# Altium PCB AD8368.PcbDoc
Units mil, origin at the board's own origin, x right, y up, seen from the top; angles counter-clockwise.
Board outline 800 x 800 mil, 4 copper layers (Top Layer, Layer 1, Layer 2, Bottom Layer), stack 23.756 mil thick; 26 components, 15 nets, 86 pads, 89 vias.
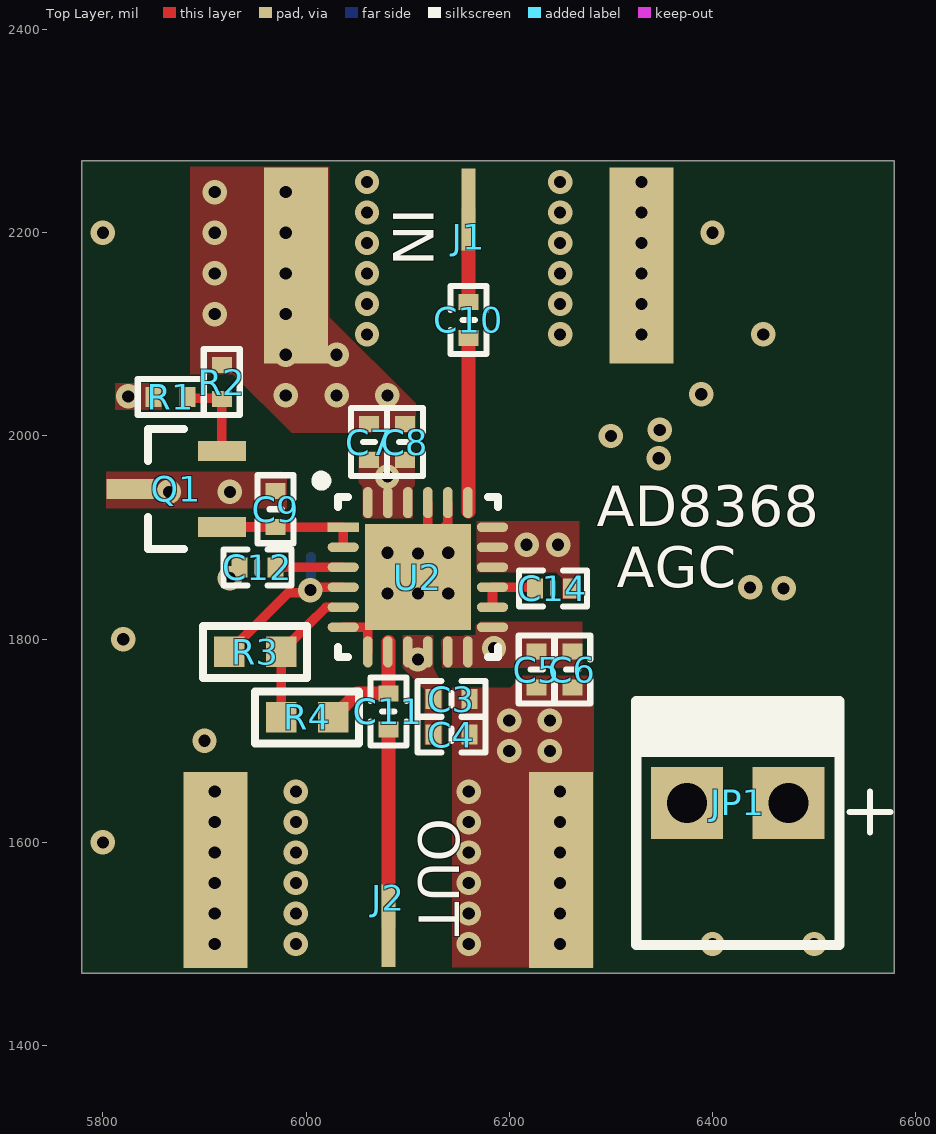
[diagram p0: Top Layer view]
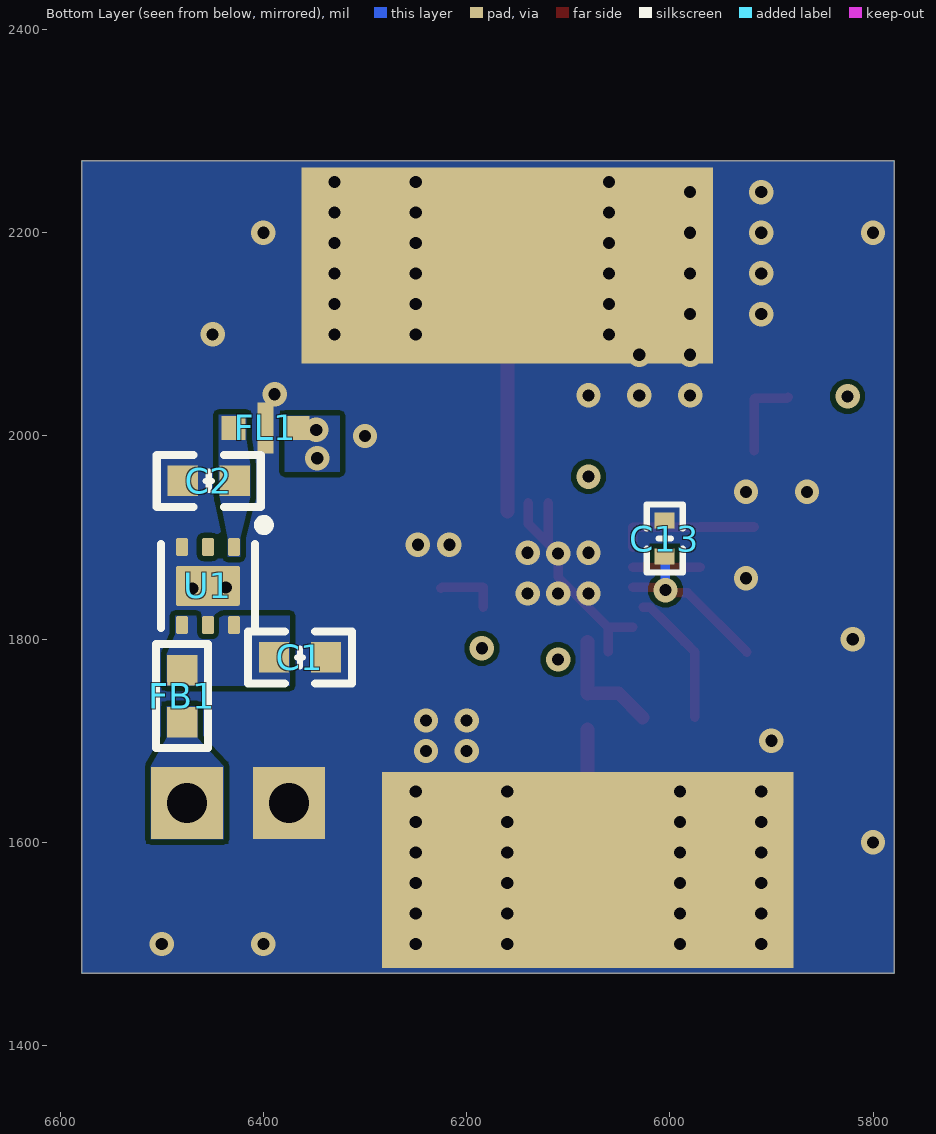
[diagram p1: Bottom Layer view, seen from below]
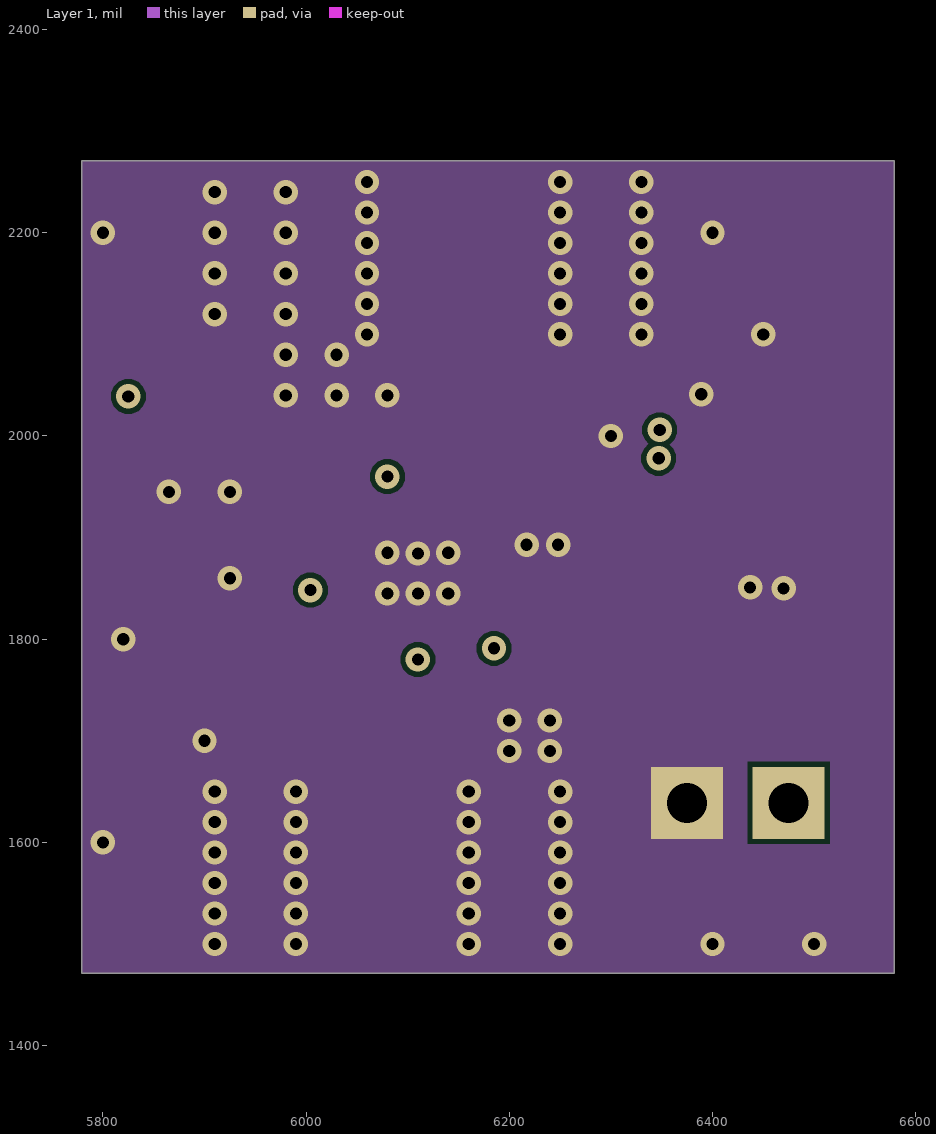
[diagram p2: Layer 1]
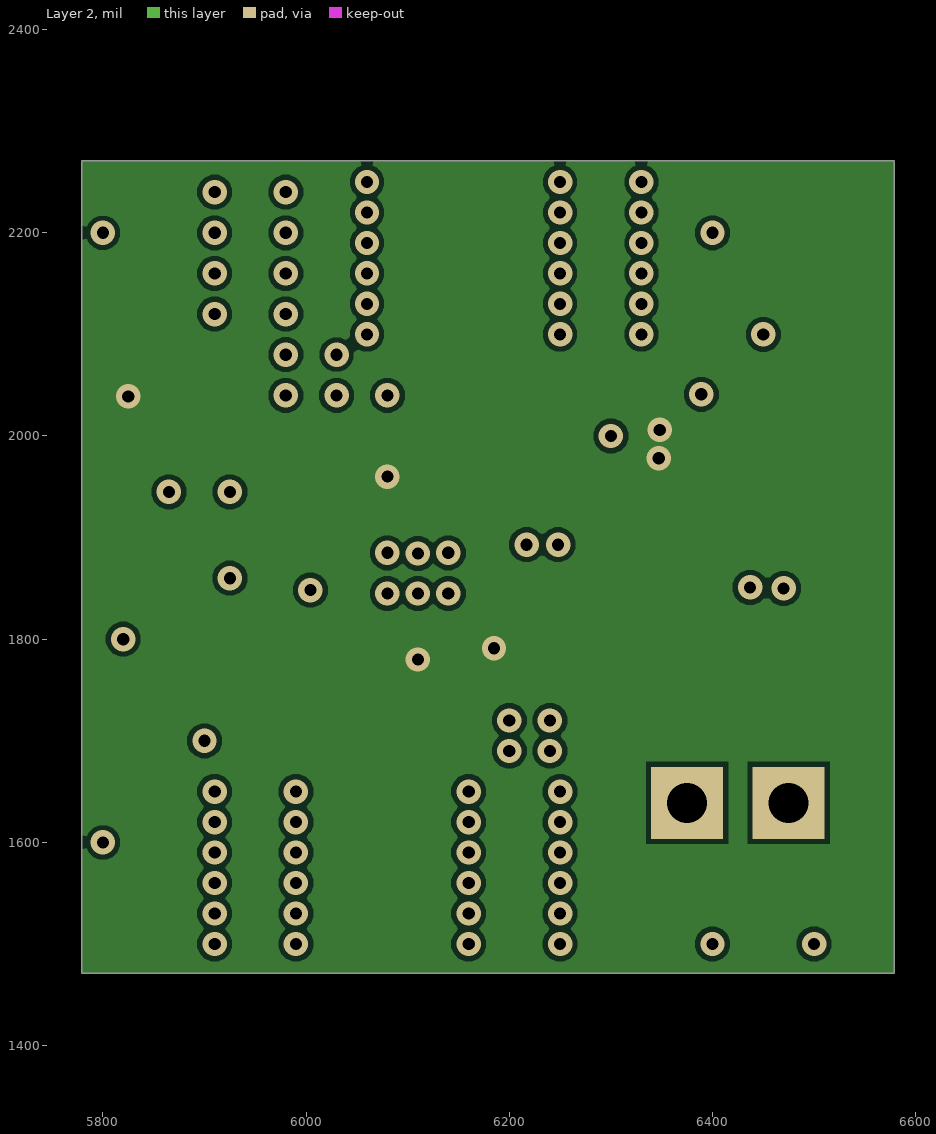
[diagram p3: Layer 2]

## Layer stack, top to bottom
Top Solder: solder mask 0.4, Solder Resist, Dk 3.5
Top Layer: signal copper 1.4
Dielectric 2: prepreg 2.8, PP-006, Dk 4.1
Layer 1: signal copper 1.378
Dielectric 1: dielectric 12.6, FR-4, Dk 4.8
Layer 2: signal copper 1.378
Dielectric 3: prepreg 2.8, PP-006, Dk 4.1
Bottom Layer: signal copper 1.4
Bottom Solder: solder mask 0.4, Solder Resist, Dk 3.5

## Board outline
5779,1471 6579,1471 6579,2271 5779,2271

## Design rules (kind name [scope] priority, off if disabled: settings)
Clearance [All] p1: gap=4 ignorepadtopadclearanceinfootprint=TRUE
PlaneConnect [All] p1: planeconnectstyle=Direct reliefexpansion=20 reliefentries=4 reliefconductorwidth=10 reliefairgap=10
PolygonConnect [All] p1: connectstyle=Direct reliefconductorwidth=10 reliefentries=4 polygonreliefangle="90 Angle" airgapwidth=10
RoutingVias [All] p1: holewidth=28 width=50 viastyle="Through Hole" minholewidth=28 minwidth=50 maxholewidth=28 maxwidth=50
SolderMaskExpansion [All] p1: expansion=4 istentingtop=FALSE
Width [All] p1: maxlimit=20 minlimit=9 preferedwidth=13.48
29 further rules are at their usual default settings.

## Components (designator, comment, footprint, x,y, rotation, side; value= is the part's Value field where it differs from the comment)
C1 "1uF" "C 0603_L" 6364,1782 r180 bottom
C2 "4.7uF" "C 0603_L" 6453.77,1955.8 r0 bottom
C3 "1nF" "C 0402_L" 6143,1741 r180 top
C4 "100nF" "C 0402_L" 6143,1706 r180 top
C5 "1nF" "C 0402_L" 6227,1770 r90 top
C6 "100nF" "C 0402_L" 6262,1770 r90 top
C7 "1nF" "C 0402_L" 6062,1994 r270 top
C8 "100nF" "C 0402_L" 6097.33,1993.94 r270 top
C9 "100nF" "C 0402_L" 5970,1927.93 r270 top
C10 "100nF" "C 0402_L" 6160,2114.28 r270 top
C11 "100nF" "C 0402_L" 6081,1729 r270 top
C12 "100nF" "C 0402_L" 5952.28,1870.72 r180 top
C13 "3.3nF" "C 0402_L" 6005,1899 r90 bottom
C14 "8.2nF" "C 0402_L" 6243,1850 r0 top
FB1 "120欧磁珠" "R 0603_L" 6480,1744 r90 bottom
FL1 "NFM18CC223R1C3D" FIL_NFM18CC223R1C3D 6398.01,2008 r180 bottom
J1 "132414" CONN_132414_AMP 6160,2368 r0 top
J2 "132414" CONN_132414_AMP 6081,1373 r180 top
JP1 "HDR-1X2" KF2510-LI-2P 6425,1639 r0 top
Q1 "2N2907" SOT23-3N 5872,1948 r90 top
R1 "910" "R 0402_L" 5867.73,2038.23 r180 top
R2 "100" "R 0402_L" 5917,2054 r270 top
R3 "120" "R 0603_L" 5949.82,1787.41 r0 top
R4 "270" "R 0603_L" 6001,1723 r0 top
U1 "LP5912-5.0DRVT" FP-DRV0006A-MFG 6454.59,1852.39 r270 bottom
U2 "AD8368ACPZ-REEL7" FP-CP-24-7-IPC_C 6110,1861 r0 top

## Footprints (in the part's own frame and the unit in brackets; to place one, negate y for a bottom-side part, rotate by r counter-clockwise, add the part's x,y. Pads: shape width x height; smd on the part's side, far side on the other; paste and mask are expansions set on the pad)
"C 0402_L" [mm] "无极性贴片电容"
  rect 0.4x0.5 smd: 1(-0.45,0) 2(0.45,0)
  silkscreen extent -0.85,-0.45 0.85,0.45, body extent -0.5,-0.26 0.5,0.26, height 0.53
"C 0603_L" [mil] "无极性贴片电容"
  rect 30x30 smd: 1(-25.59,0) 2(25.59,0)
  silkscreen extent -51,-26 51,26, body extent -31,-16 31,16, height 32
CONN_132414_AMP [mil]
  rect 13.75x81 smd paste+0 mask+0: 1(0,-145)
  rect 63x193 smd mask+0: 2(-170,-200) 3(170,-200)
  rect 405x193 smd far side mask+0: 4(0,-200)
  body extent -188,-292 188,270, height 162
FIL_NFM18CC223R1C3D [mm]
  rect 0.6x0.6 smd: 1(-0.8,0) 3(0.8,0)
  rect 0.4x1.27 smd: 2(0,0)
  body extent -0.8,-0.4 0.8,0.4, height 0.7
FP-CP-24-7-IPC_C [mm]
  rect 0.781x0.239 smd paste+0 mask+0: 1(-1.866,1.25)
  rrect100% 0.781x0.239 smd paste+0 mask+0: 2(-1.866,0.75) 3(-1.866,0.25) 4(-1.866,-0.25) 5(-1.866,-0.75) 6(-1.866,-1.25) 13(1.866,-1.25) 14(1.866,-0.75) 15(1.866,-0.25) 16(1.866,0.25) 17(1.866,0.75) 18(1.866,1.25)
  rrect100% 0.239x0.781 smd paste+0 mask+0: 7(-1.25,-1.866) 8(-0.75,-1.866) 9(-0.25,-1.866) 10(0.25,-1.866) 11(0.75,-1.866) 12(1.25,-1.866) 19(1.25,1.866) 20(0.75,1.866) 21(0.25,1.866) 22(-0.25,1.866) 23(-0.75,1.866) 24(-1.25,1.866)
  rect 2.65x2.65 smd paste-1000 mask+0: 25(0,0)
  silkscreen extent -2.54,-2 2,2.54, body extent -2.36,-2.36 2.36,2.36, height 0.25
FP-DRV0006A-MFG [mm]
  rrect33% 0.45x0.3 smd paste+0 mask+0: 1(-0.975,0.65) 2(-0.975,0) 3(-0.975,-0.65) 4(0.975,-0.65) 5(0.975,0) 6(0.975,0.65)
  rrect10% 1x1.6 smd paste-1000 mask+0: 7(0,0)
  silkscreen extent -1.65,-1.17 1.05,1.52, body extent -1,-1 1,1, height 0.8
KF2510-LI-2P [mm] "接插件/2A"
  rect 1.8x1.8 hole 1: 1(-1.27,0) 2(1.27,0)
  silkscreen extent -2.59,-3.56 2.54,2.54, body extent -2.54,-3.5 2.54,2.4, height 11.05
"R 0402_L" [mm] "1/16W贴片电阻 https://item.taobao.com/item.htm?ft=t&id=613637044352"
  rect 0.4x0.5 smd: 1(-0.4,0) 2(0.45,0)
  silkscreen extent -0.8,-0.45 0.85,0.45, body extent -0.5,-0.25 0.5,0.25, height 0.3
"R 0603_L" [mil] "1/10W贴片电阻 https://item.taobao.com/item.htm?ft=t&id=613637044352"
  rect 30x30 smd: 1(-25.59,0) 2(25.59,0)
  silkscreen extent -51,-26 51,26, body extent -31,-16 31,16, height 16
SOT23-3N [mm] "3x1.3x1mm(长宽高)"
  rect 0.5x1.2 smd: 1(-0.95,-1.143) 2(0.95,-1.143) 3(0,1.143)
  silkscreen extent -1.5,-0.2 1.5,0.7, body extent -1.5,-1.2 1.5,1.2, height 1.05

## Part data
C1 C2 C3 C4 C5 C6 C7 C8 C9 C10 C11 C12 C13 C14: library part C, "贴片电容", BOM名称=贴片电容, 下单链接=https://item.taobao.com/item.htm?ft=t&id=613637044352, 淘宝ID=小糖豆的小窝窝
FB1 R1 R2 R3 R4: library part R, "贴片电阻", BOM名称=贴片电阻, 下单链接=https://item.taobao.com/item.htm?ft=t&id=613637044352, 淘宝ID=小糖豆的小窝窝
FL1: "SMD Capacitor with Capacitance: 22000pF Tol. 20%. Rated Voltage: 16Vdc", Package=NONSTANDARD, Availability="In Stock", Check_prices=https://www.snapeda.com/parts/NFM18CC223R1C3D/Murata/view-part/?ref=eda, MF=Murata, MP=NFM18CC223R1C3D, Price=None, Purchase-URL=https://pricing.snapeda.com/search/part/NFM18CC223R1C3D/?ref=eda, SnapEDA_Link=https://www.snapeda.com/parts/NFM18CC223R1C3D/Murata/view-part/?ref=snap
J1 J2: "No Description Available", Mfr_Name="Amphenol ICC", Copyright="Copyright (C) 2022 Ultra Librarian. All rights reserved.", Manufacturer_Part_Number=132414, RefDes=RefDes, Type=DEV
JP1: library part "Header 2", "2P接插件", BOM名称=2P接插件, 下单链接=https://item.taobao.com/item.htm?ft=t&id=613637044352, 淘宝ID=小糖豆的小窝窝
Q1: library part 2N-PNP, "PNP型三极管", BOM名称=NPN型三极管, 下单链接=https://item.taobao.com/item.htm?ft=t&id=613637044352, 淘宝ID=小糖豆的小窝窝
U1: library part LP5912, "IC REG LINEAR  5.0V 500MA 6SON", Dropout Voltage=950mV, Max Operating Temperature=125°C, Min Operating Temperature=-40°C, Output Current=500mA, Output Voltage=3.3V, Quiescent Current=30uA, Lead Free="Lead Free", Mount="Surface Mount", Number of Pins=6, Number of Regulators=1, Packaging="Tape and Reel", RoHS Compliant=Yes
U2: "IC OPAMP VGA 1 CIRCUIT 24LFCSP", Case/Package="LFCSP EP", Input Bias Current=150uA, Input Resistance=50R, Max Frequency=800MHz, Max Operating Temperature=85°C, Max Supply Voltage=5.5V, Min Operating Temperature=-40°C, Min Supply Voltage=4.5V, Operating Supply Current=60mA, Operating Supply Voltage=5V, Package Quantity=1, Power Dissipation=440mW, Voltage Gain=22dB, -3db Bandwidth=800MHz, Gain=34dB, Gain Bandwidth Product=800MHz, Lead Free="Contains Lead", Mount="Surface Mount", Number of Channels=1, Number of Circuits=1, Number of Elements=1, Number of Pins=24, Packaging="Tape and Reel", Radiation Hardening=No, REACH SVHC="No SVHC", RoHS Compliant=Yes, Series=X-AMP®

## Via types
v1: diameter 24, hole 12, Top Layer to Bottom Layer, tented both sides, 89 vias

## Nets (pads, with @x,y where several pads share a name; then routed paths per layer and width w, separated by ;. In a path a pad name is that pad's centre, name@x,y a point inside that pad or via, vN(x,y) a via of type N, cw(c..) or ccw(c..) an arc to the next point about the centre after c; other vN are vias at no path point)
+5: C3.2 C4.2 C5.2 C6.2 C7.2 C8.2 FL1.3 R1.2 U2.9 U2.10 U2.11 U2.12 U2.13 U2.22 U2.23 U2.24
  other v1: 6110,1780 6185,1791 6080,1960 6347.01,1978 6348.01,2006 5825,2039
DECL: C13.1 R3.1 U2.4 | length 172
  Top Layer w9.42: R3.1 5982.36,1845.54 6001.46,1845.54 v1(6004.25,1848.33) 6008.19,1848.33 6011.02,1851.16 U2.4
  Bottom Layer w9.42: v1(6004.25,1848.33) 6004.62,1848.71 6004.62,1880.91 C13.1
DETI: R3.2 R4.1 U2.5 | length 133.2
  Top Layer w9.42: R4.1 R3.2 ; R3.2@5975.41,1787.47 5975.47,1787.47 5985.7,1797.7 5985.7,1797.76 6001.94,1814 6019.41,1831.47 U2.5@6025.89,1831.47
GND: C1.2 C2.2 C3.1 C4.1 C5.1 C6.1 C7.1 C8.1 C9.1 C12.2 C13.2 C14.2 FL1.2 J1.2 J1.3 J1.4 J2.2 J2.3 J2.4 JP1.1 Q1.3 R2.1 U1.3 U1.5 U1.7 U2.6 U2.7 U2.16 U2.17 U2.18 U2.20 U2.21 U2.25 | length 244
  Top Layer w9.42: U2.6 U2.25@6060.79,1811.79 ; U2.7 U2.25@6060.79,1811.79 ; U2.21 U2.25@6119.84,1894.17 ; U2.20 6139.53,1913.85 U2.25@6119.84,1894.17 ; U2.25@6060.79,1811.79 U2.25 v1(6110,1884.32) U2.25@6119.84,1894.17
  other v1: 5910,1500 5990,1500 6160,1500 6250,1500 6400,1500 6500,1500 5910,1530 5990,1530 6160,1530 6250,1530 5910,1560 5990,1560 6160,1560 6250,1560 5910,1590 5990,1590 6160,1590 6250,1590 5800,1600 5910,1620 5990,1620 6160,1620 6250,1620 5910,1650 5990,1650 6160,1650 6250,1650 6200,1690 6240,1690 5900,1700 6200,1720 6240,1720 5820,1800 6080,1845 6110,1845 6140,1845 6470,1850 6437,1851 5925,1860 6080,1885 6140,1885 6217,1893 6248,1893 5865,1945 5925,1945 6300,2000 5980,2040 6030,2040 6080,2040 6389.01,2041 5980,2080 6030,2080 6060,2100 6250,2100 6330,2100 6450,2100 5910,2120 5980,2120 6060,2130 6250,2130 6330,2130 5910,2160 5980,2160 6060,2160 6250,2160 6330,2160 6060,2190 6250,2190 6330,2190 5800,2200 5910,2200 5980,2200 6400,2200 6060,2220 6250,2220 6330,2220 5910,2240 5980,2240 6060,2250 6250,2250 6330,2250
NetC1_1: C1.1 FB1.2 U1.4 U1.6
NetC2_1: C2.1 FL1.1 U1.1
NetC10_1: C10.1 J1.1 | length 91
  Top Layer w13.75: C10.1 J1.1
NetC10_2: C10.2 U2.19 | length 170.9
  Top Layer w13.75: U2.19@6160,1925.72 C10.2
NetC11_2: C11.2 J2.1 | length 193.3
  Top Layer w13.75: J2.1 C11.2
NetC12_1: C12.1 U2.3 | length 66.6
  Top Layer w9.42: C12.1 5970.13,1870.84 U2.3
NetC14_1: C14.1 U2.14 U2.15 | length 62
  Top Layer w9.42: U2.14 U2.15 6224.13,1851.16 C14.1
NetQ1_2: Q1.2 R1.1 R2.2 | length 85.2
  Top Layer w9.42: R1.1 5884.46,2037.26 5916.02,2037.26 R2.2 Q1.2
OUTP: C11.1 R4.2 U2.8 | length 114.6
  Top Layer w13.48: R4.2 6050.31,1746.72 C11.1
  Top Layer w13.75: C11.1 U2.8@6081,1797.08
RAW: FB1.1 JP1.2
VAGC: C9.2 Q1.1 U2.1 U2.2 | length 139.4
  Top Layer w9.42: Q1.1 5917.19,1910.41 5969.81,1910.41 C9.2 U2.1 U2.2
pads on no net: U1.2

## Polygon pours and split planes (outlines as drawn)
GND on Bottom Layer "NONET_L-01_P-001" (solid, remove dead copper, pour order 12): 5779,2271 6579,2271 6579,1471 5779,1471
+5 on Bottom Layer "NONET_L-01_P-001" (solid, remove dead copper, pour order 7): 6379.01,1965 6379.01,2020 6325.01,2020 6325.01,1965
NetC2_1 on Bottom Layer "NONET_L-01_P-001" (solid, remove dead copper, pour order 6): 6413,1955.5 6444,1958 6444,1996 6444,2021 6417,2021 6417,1997 6413,1971
NetC2_1 on Bottom Layer "NONET_L-01_P-001" (solid, remove dead copper, pour order 5): 6423,1881 6435,1881 6435,1900 6444,1945 6444,1971 6413,1971 6413,1940 6423,1900
GND on Bottom Layer "NONET_L-01_P-001" (solid, remove dead copper, pour order 4): 6474.11,1867.78 6486.1,1867.78 6486.1,1899.62 6474.39,1899.62
GND on Bottom Layer "NONET_L-01_P-001" (solid, remove dead copper, pour order 3): 6448.63,1805.16 6460.49,1805.16 6460.49,1835.37 6448.9,1835.37
NetC1_1 on Bottom Layer "NONET_L-01_P-001" (solid, remove dead copper, pour order 2): 6374,1754 6495,1754 6495,1785 6487,1805 6487,1823 6374,1823
RAW on Bottom Layer "RAW" (solid, remove dead copper, pour order 1): 6439,1603 6439,1675 6464.95,1702.94 6464.95,1734 6495,1734 6495,1703 6511,1675 6511,1603
GND on Top Layer "NONET_L-01_P-001" (solid, remove dead copper, pour order 18): 5803.39,1929 5981,1929 5981,1963 5982,1964 5981,1965 5803.39,1965
GND on Top Layer "NONET_L-01_P-001" (solid, remove dead copper, pour order 15): 6144,1752 6144,1657 6144,1477 6283,1477 6283,1764 6213,1764 6201,1752
GND on Top Layer "NONET_L-01_P-001" (solid, remove dead copper, pour order 14): 5886,2061 5886,2265 6023,2265 6023,2117 6108,2032 6108,2003 5986,2003 5928,2061
GND on Top Layer "NONET_L-01_P-001" (solid, remove dead copper, pour order 13): 6168,1916 6168,1866 6246,1866 6252,1860 6252,1840 6269,1840 6269,1916
+5 on Top Layer "NONET_L-01_P-001" (solid, remove dead copper, pour order 11): 6105,1919 6056,1919 6056,1950 6052,1954 6052,1985 6107,1985 6107,1951 6105,1949
+5 on Top Layer "NONET_L-01_P-001" (solid, remove dead copper, pour order 10): 6134.03,1772 6272,1772 6272,1817 6170.86,1817 6154.86,1803 6133,1803
+5 on Top Layer "NONET_L-01_P-001" (solid, remove dead copper, pour order 9): 6095,1804 6095,1772 6117,1750 6117,1696 6134,1696 6134,1755 6125,1772 6125,1804
+5 on Top Layer "NONET_L-01_P-001" (solid, remove dead copper, pour order 8): 5858,2026 5812,2026 5812,2052 5858,2052
GND on Layer 1 "NONET_L-01_P-001" (solid, remove dead copper, pour order 16): 5779,2271 6579,2271 6579,1471 5779,1471
+5 on Layer 2 "NONET_L-01_P-001" (solid, remove dead copper, pour order 17): 5779,2271 6579,2271 6579,1471 5779,1471

## Silkscreen, mask and mechanical layers (free items; w line width, h text height)
Top Overlay:
  lines w6: 6535,1630 6575,1630 ; 6555,1610 6555,1650
  text "IN" at 6086,2224 h40 r270
  text "AD8368" at 6286,1911 h40
  text "AGC" at 6306,1851 h40
  text "OUT" at 6111,1624 h40 r270
Mechanical 1:
  the board outline again, w6